# Altium PCB PCB design.PcbDoc
Units mm, origin at the board's own origin, x right, y up, seen from the top; angles counter-clockwise.
Board outline 52.96 x 52.45 mm, 2 copper layers (Top Layer, Bottom Layer); 17 components, 13 nets, 66 pads, 0 vias.
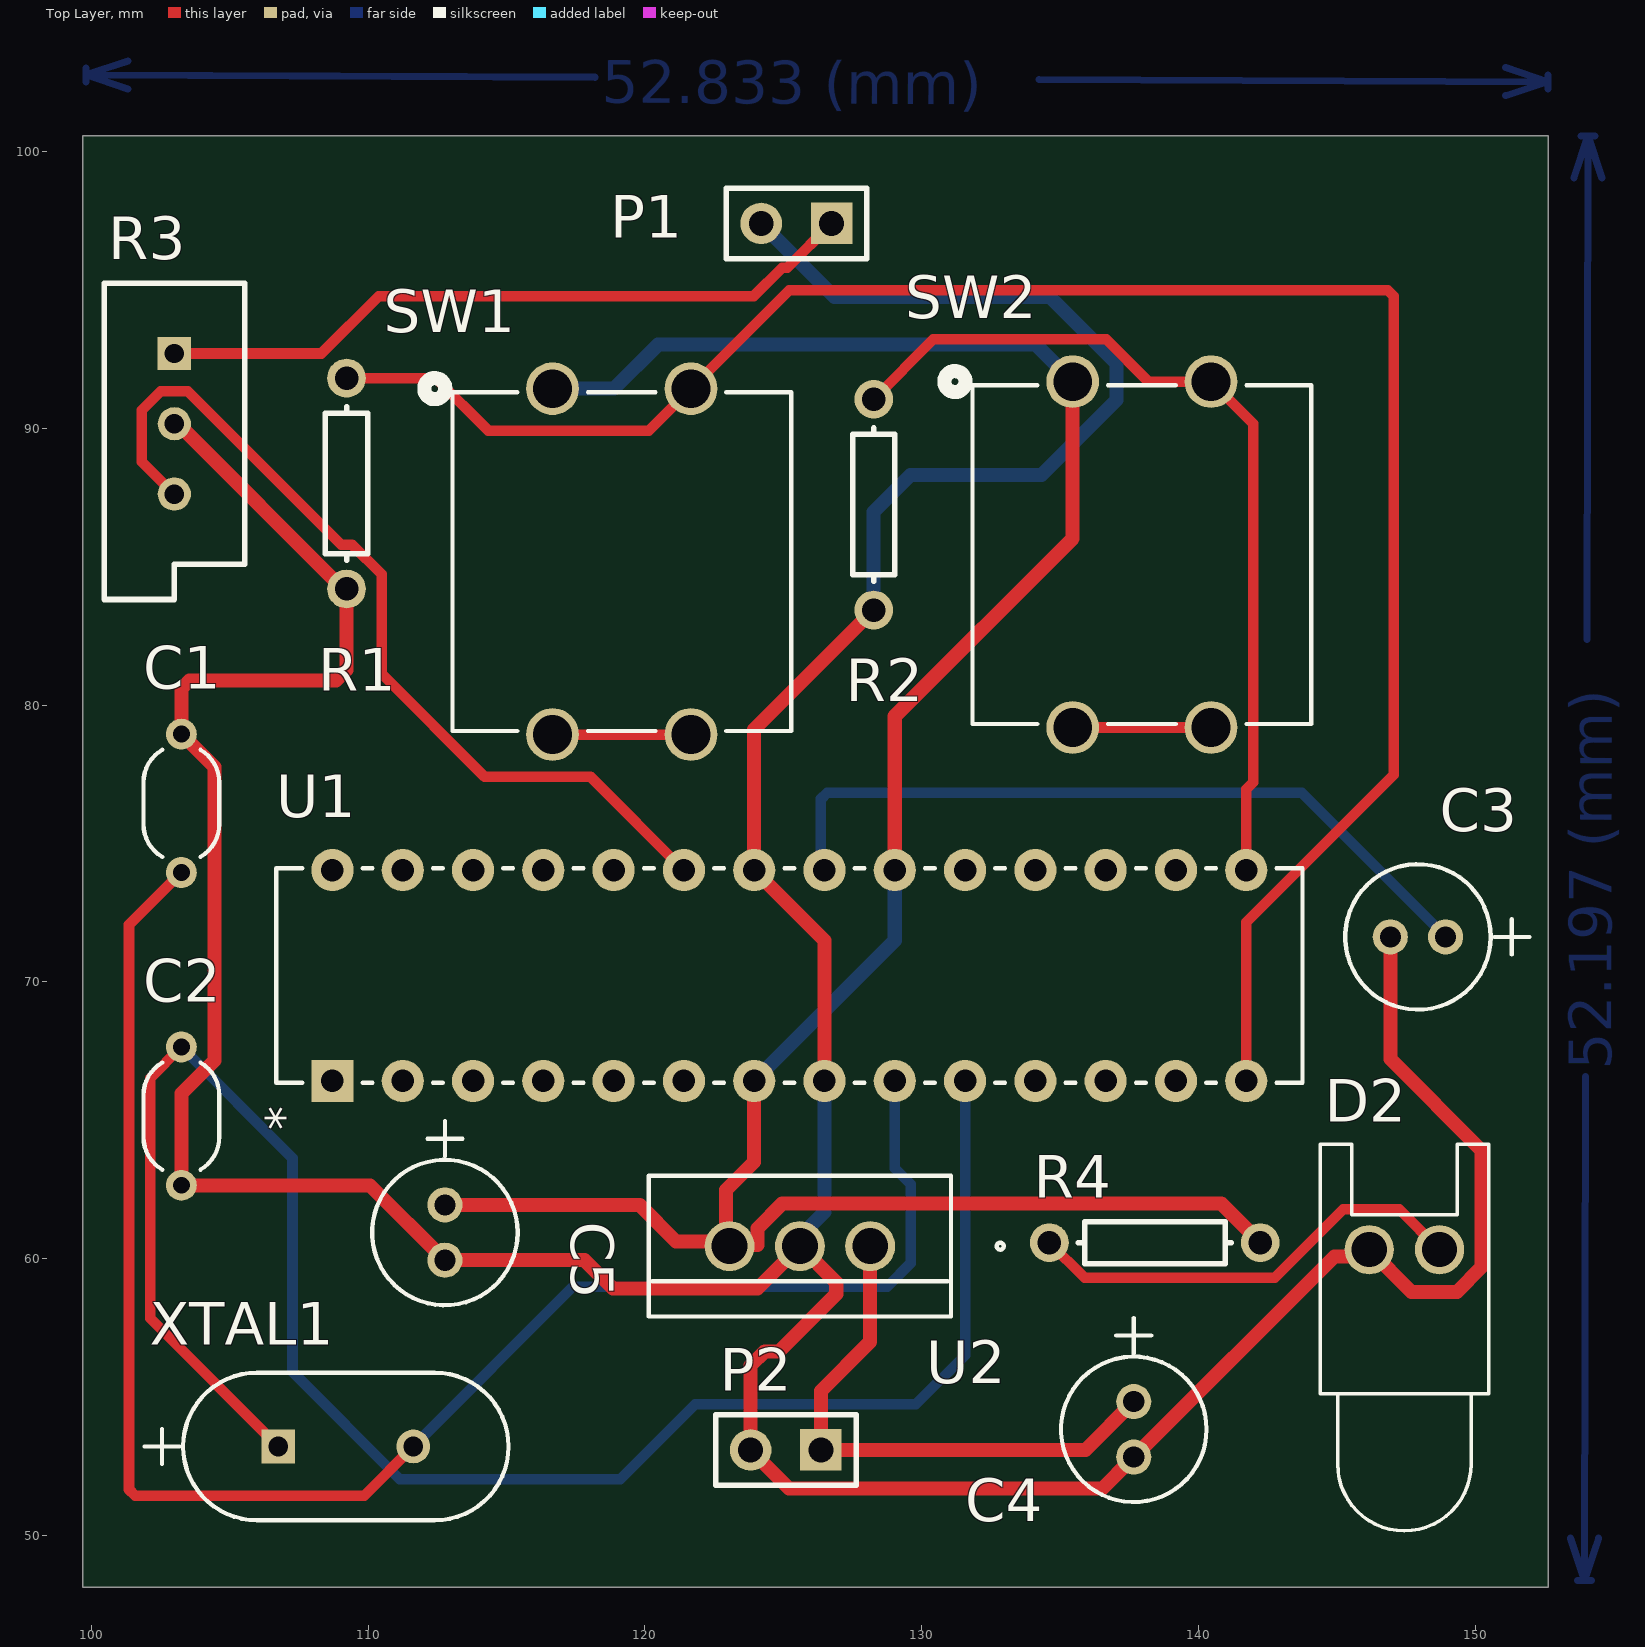
[diagram p0: Top Layer view]
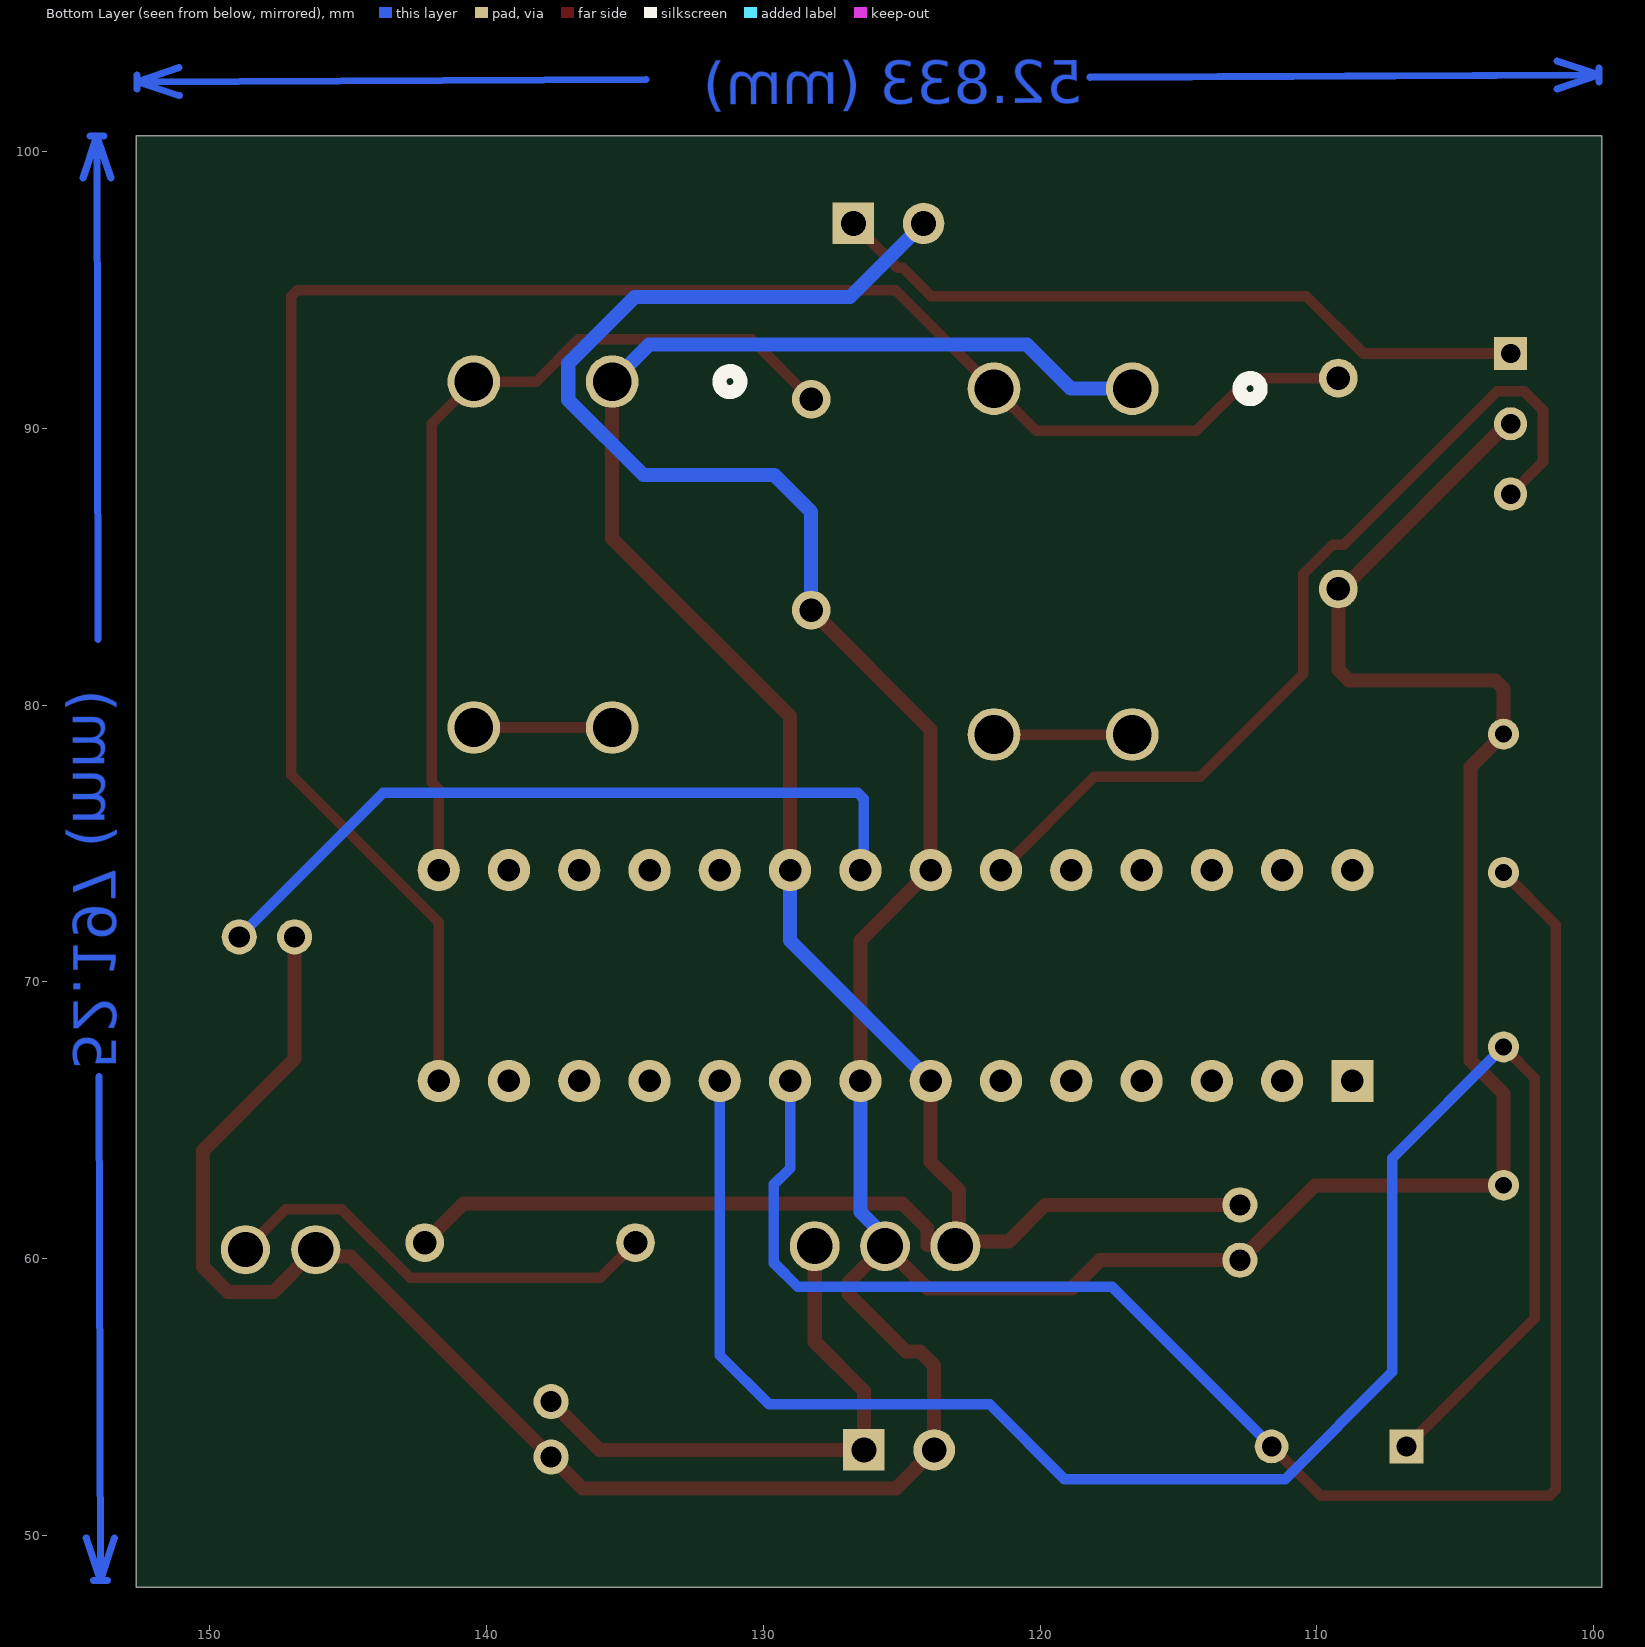
[diagram p1: Bottom Layer view, seen from below]

## Layer stack, top to bottom
Top Solder: solder mask 0.0102, Solder Resist, Dk 3.5
Top Layer: signal copper 0.0356
Dielectric 1: dielectric 0.32, FR-4, Dk 4.8
Bottom Layer: signal copper 0.0356
Bottom Solder: solder mask 0.0102, Solder Resist, Dk 3.5

## Board outline
99.695,48.133 152.654,48.133 152.654,100.584 99.695,100.584

## Design rules (kind name [scope] priority, off if disabled: settings)
Clearance [All] p1: gap=0.381 ignorepadtopadclearanceinfootprint=FALSE except(0.508: Arc-Hole Track-Hole SMDPad-Hole THPad-Hole Via-Hole Fill-Hole Poly-Hole Region-Hole Text-Hole)
ComponentClearance [All] p1: gap=0.508 collisioncheckmode=3 verticalgap=0.508 showdistances=FALSE
PolygonConnect [All] p1: connectstyle=Relief reliefconductorwidth=0.254 reliefentries=4 polygonreliefangle="90 Angle" airgapwidth=0.254
RoutingVias [All] p1: holewidth=0.711 width=1.27 viastyle="Through Hole" minholewidth=0.711 minwidth=1.27 maxholewidth=0.711 maxwidth=1.27
SilkToSolderMaskClearance [IsPad] p1: minsilkscreentomaskgap=0.229 clearancetoexposedcopper=TRUE
SolderMaskExpansion [All] p1: expansion=0.102 istentingtop=FALSE
Width Width_1 [InNet('+5') or InNet('GND') or InNet('VCC')] p1: maxlimit=0.635 minlimit=0.381 preferedwidth=0.508
Width [All] p2: maxlimit=0.508 minlimit=0.254 preferedwidth=0.381 minimp=50.000000 maximp=50.000000 favimp=50.000000
28 further rules are at their usual default settings.

## Components (designator, comment, footprint, x,y, rotation, side; value= is the part's Value field where it differs from the comment)
C1 "FA28C0G1H220JNU00" CAP_FA28_TDK 103.251,76.454 r270 top
C2 "FA28C0G1H220JNU00" CAP_FA28_TDK 103.251,65.151 r90 top
C3 "UFW2A0R1MDD1TD" CAP_UEP_5X11_NCH 148.939,71.628 r180 top
C4 "UFW2A0R1MDD1TD" CAP_UEP_5X11_NCH 137.668,54.832 r270 top
C5 "UFW2A0R1MDD1TD" CAP_UEP_5X11_NCH 112.776,61.944 r270 top
D2 "LED0" LED-0 147.447,60.325 r0 top
P1 "Header 2" HDR1X2 126.746,97.409 r180 top
P2 "Header 2" HDR1X2 126.365,53.086 r180 top
R1 "Res1" AXIAL-0.3 109.22,88.011 r90 top value=1K
R2 "Res1" AXIAL-0.3 128.27,87.249 r270 top value=1K
R3 "RPot" VR5 102.997,90.17 r270 top value=1K
R4 "Res1" AXIAL-0.3 138.43,60.579 r180 top value=1K
SW1 "TL1100FF160Q" TL1100F 116.666,91.44 r0 top
SW2 "TL1100FF160Q" TL1100F 135.462,91.694 r0 top
U1 "ATMEGA328P-PU" 28P3_ATM 108.712,66.421 r90 top
U2 "LM7805CT" TO-220_FAS 128.143,60.452 r180 top
XTAL1 "ABL-20.000MHZ-B2" XTAL_ABL_ABR 106.756,53.213 r0 top

## Footprints (in the part's own frame and the unit in brackets; to place one, negate y for a bottom-side part, rotate by r counter-clockwise, add the part's x,y. Pads: shape width x height; smd on the part's side, far side on the other; paste and mask are expansions set on the pad)
28P3_ATM [mil]
  rect 60x60 hole 32 mask+0: 1(0,0)
  round 60 hole 32 mask+0: 2(0,-100) 3(0,-200) 4(0,-300) 5(0,-400) 6(0,-500) 7(0,-600) 8(0,-700) 9(0,-800) 10(0,-900) 11(0,-1000) 12(0,-1100) 13(0,-1200) 14(0,-1300) 15(300,-1300) 16(300,-1200) 17(300,-1100) 18(300,-1000) 19(300,-900) 20(300,-800) 21(300,-700) 22(300,-600) 23(300,-500) 24(300,-400) 25(300,-300) 26(300,-200) 27(300,-100) 28(300,0)
  silkscreen extent -3,-1380 303,80, body extent -20,-1365 299,85, height 205
AXIAL-0.3 [mm] "Axial Device, Thru-Hole; 2 Leads; 0.3 in Pin Spacing"
  round 1.4 hole 0.85: 1(-3.81,0) 2(3.81,0)
  silkscreen extent -2.77,-0.76 2.77,0.76
CAP_FA28_TDK [mil]
  round 44 hole 24 mask+0: 1(-98.43,0) 2(98.43,0)
  silkscreen extent -76,-54 76,54, body extent 0,0 10,10, height 10
CAP_UEP_5X11_NCH [mil]
  round 50 hole 30 mask+0: 1(0,0) 2(78.74,0)
  silkscreen extent -119,-103 143,103, body extent -60,-98 138,98, height 493
HDR1X2 [mm] "Connector; Header; 2 Position"
  rect 1.5x1.5 hole 0.9: 1(0,0)
  round 1.5 hole 0.9: 2(2.54,0)
  silkscreen extent -1.27,-1.27 3.81,1.27
LED-0 [mil] "LED; 2 Leads"
  round 70 hole 50: 1(50,0) 2(-50,0)
  silkscreen extent -120,-400 120,150
TL1100F [mm]
  round 1.905 hole 1.397 mask+0: 1(0,0) 2(0,-12.5) 3(5,0) 4(5,-12.5)
  silkscreen extent -4.64,-12.37 8.62,0.38, body extent -3.71,-13.23 8.29,0.78, height 8.35
TO-220_FAS [mil]
  round 71 hole 51 mask+0: 1(0,0) 2(100,0) 3(200,0)
  silkscreen extent -190,-100 315,100, body extent -110,-95 310,95, height 650
VR5 [mm] "Thru-Hole; 3 Leads"
  rect 1.2x1.2 hole 0.7: 1(-2.54,0)
  round 1.2 hole 0.7: 2(0,0) 3(2.54,0)
  silkscreen extent -5.08,-2.54 6.35,2.54
XTAL_ABL_ABR [mil]
  rect 48x48 hole 28 mask+0: 1(0,0)
  round 48 hole 28 mask+0: 2(192,0)
  silkscreen extent -190,-105 328,105, body extent -141,-110 332,110, height 138

## Part data
C1 C2 C3 C4 C5 SW1 SW2 U1 U2 XTAL1: "No Description Available", Copyright="Copyright (C) 2018 Accelerated Designs. All rights reserved", RefDes=RefDes, Type=DEV
  C1 C2: Built_By=EMA_Matt, Manufacturer_Part_Number=FA28C0G1H220JNU00, SourceLibrary=TDK_2019-10-09, Vendor=TDK
  C3 C4 C5: Built_By=EMA_Cory, Manufacturer_Part_Number=UFW2A0R1MDD1TD, SourceLibrary=Nichicon_2019-09-13, Vendor=Nichicon
  SW1 SW2: Built_By=EMA_Cory, Datasheet=https://sten-eswitch-13110800-production.s3.amazonaws.com/system/asset/product_line/data_sheet/143/TL1100.pdf, Manufacturer_Part_Number=TL1100FF160Q, SourceLibrary=E-Switch_2020-03-31, Vendor=E-Switch
  U1: Built_By=EMA_UL_Team, Manufacturer_Part_Number=ATMEGA328P-PU, SourceLibrary=Atmel_2011-04-02, Vendor=Atmel
  U2: Built_By=EMA_UL_Team, Manufacturer_Part_Number=LM7805CT, SourceLibrary=Fairchild_2008-01-01_, Vendor="Fairchild Semiconductor"
  XTAL1: Built_By=EMA_Cory, Datasheet=https://abracon.com/Resonators/ABL.pdf, Manufacturer_Part_Number=ABL-20.000MHZ-B2, SourceLibrary=Add_to_database_2020-12-08, Vendor=Abracon
D2: "Typical INFRARED GaAs LED", LatestRevisionDate=08-Jul-2005, LatestRevisionNote="Mech Layer 1 removed.", PackageDescription="LED; 2 Leads", PackageReference=LED-0, Published=8-Jun-2000, Publisher="Altium Limited"
P1 P2: "Header, 2-Pin", LatestRevisionDate=17-Jul-2002, LatestRevisionNote="Re-released for DXP Platform.", Publisher="Altium Limited"
R1 R2 R4: "Resistor", LatestRevisionDate=17-Jul-2002, LatestRevisionNote="Re-released for DXP Platform.", PackageDescription="Axial Device, Thru-Hole; 2 Leads; 0.3 in Pin Spacing", PackageReference=AXIAL-0.3, Published=8-Jun-2000, Publisher="Altium Limited"
R3: "Potentiometer", LatestRevisionDate=17-Jul-2002, LatestRevisionNote="Re-released for DXP Platform.", PackageDescription="Variable Resistor, Thru-Hole; 3 Leads", PackageReference=VR5, Published=8-Jun-2000, Publisher="Altium Limited", Set Position=0.5, Sim Note="Enter the Resistance value and the set point into parameter fields."

## Nets (pads, with @x,y where several pads share a name; then routed paths per layer and width w, separated by ;. In a path a pad name is that pad's centre, name@x,y a point inside that pad or via, vN(x,y) a via of type N, cw(c..) or ccw(c..) an arc to the next point about the centre after c; other vN are vias at no path point)
+5: C5.1 R4.1 SW1.1 SW2.1 U1.7 U1.20 U2.3 | length 88.2
  Top Layer w0.508: C5.1 119.815,61.944 121.132,60.627 122.888,60.627 U2.3@122.936,60.579 ; U1.7 123.952,63.5 122.936,62.484 U2.3@122.936,60.579 ; U1.20 129.032,79.601 135.462,86.031 SW2.1 ; R4.1 140.83,61.989 124.966,61.989 124.066,61.089 124.066,60.496 123.107,60.496 U2.3 U2.3@122.936,60.579
  Bottom Layer w0.508: SW1.1@116.459,91.567 116.586,91.44 SW1.1 118.89,91.44 120.478,93.027 128.189,93.027 134.129,93.027 SW2.1 ; U1.7 129.032,71.501 U1.20
GND: C1.1 C2.1 C3.2 C4.2 C5.2 D2.2 P1.2 P2.2 R1.1 R2.2 R3.2 U1.8 U1.22 U2.2 | length 172.7
  Top Layer w0.508: R3.2 103.124,90.17 109.093,84.201 R1.1 109.22,81.28 108.839,80.899 103.549,80.899 103.251,80.601 C1.1 104.445,77.76 104.445,67.157 103.251,65.963 C2.1 110.069,62.651 C5.2 117.827,59.944 118.855,58.915 124.066,58.915 U2.2 ; U2.2@125.603,60.803 U2.2 ; U1.8 126.492,71.501 U1.22 123.952,79.121 R2.2 ; C3.2 146.939,67.209 150.241,63.907 150.241,59.694 149.348,58.801 147.701,58.801 D2.2 145.934,60.082 144.918,60.082 C4.2 137.795,52.705 137.541,52.705 136.537,51.701 125.21,51.701 P2.2 123.825,56.134 124.333,56.642 124.841,56.642 126.917,58.718 126.917,59.138 U2.2
  Bottom Layer w0.508: P1.2 126.861,94.754 134.647,94.754 137.05,92.352 137.05,91.036 134.327,88.314 129.605,88.314 128.27,86.979 R2.2 ; U2.2 125.603,60.803 126.492,61.692 U1.8
NetC1_2: C1.2 U1.9 XTAL1.2 | length 61.7
  Top Layer w0.381: C1.2 101.359,72.062 101.359,51.658 101.582,51.435 109.855,51.435 XTAL1.2
  Bottom Layer w0.381: XTAL1.2 117.399,58.979 128.753,58.979 129.616,59.842 129.616,62.685 129.032,63.269 U1.9
NetC2_2: C2.2 U1.10 XTAL1.1 | length 67.9
  Top Layer w0.381: C2.2 102.121,66.521 102.121,57.848 XTAL1.1
  Bottom Layer w0.381: C2.2 107.268,63.634 107.268,55.908 111.144,52.032 119.116,52.032 121.821,54.737 129.794,54.737 131.572,56.515 U1.10
NetC3_1: C3.1 U1.21 | length 27.4
  Bottom Layer w0.381: U1.21 126.365,74.168 126.365,76.612 126.588,76.835 143.732,76.835 C3.1
NetD2_1: D2.1 R4.2 | length 16.3
  Top Layer w0.381: R4.2 135.892,59.307 142.767,59.307 145.245,61.785 147.256,61.785 D2.1
NetP1_1: P1.1 R3.1 | length 25.7
  Top Layer w0.381: R3.1 108.311,92.71 110.381,94.78 123.928,94.78 124.963,95.815 125.152,95.815 P1.1
NetSW1_2: SW1.2 SW1.4 | length 5
  Top Layer w0.381: SW1.2 SW1.4
NetSW2_2: SW2.2 SW2.4 | length 5
  Top Layer w0.381: SW2.2 SW2.4
"Next BTN": R2.1 SW2.3 U1.15 | length 32.1
  Top Layer w0.381: R2.1 130.429,93.218 136.678,93.218 138.202,91.694 SW2.3 141.986,90.17 141.986,77.215 141.732,76.961 U1.15
"Play / Stop BTN": R1.2 SW1.3 U1.14 | length 71.4
  Top Layer w0.381: R1.2 112.444,91.821 114.349,89.916 120.142,89.916 SW1.3 125.222,94.996 146.843,94.996 147.066,94.773 147.066,77.489 141.732,72.155 U1.14
Speaker: R3.3 U1.23 | length 32.7
  Top Layer w0.381: R3.3 101.825,88.802 101.825,90.655 102.512,91.342 103.482,91.342 109.022,85.801 109.418,85.801 110.492,84.728 110.492,81.131 114.207,77.416 118.037,77.416 U1.23
VCC: C4.1 P2.1 U2.1 | length 20.1
  Top Layer w0.508: U2.1 128.143,56.998 126.365,55.22 P2.1 135.922,53.086 C4.1
pads on no net: U1.1 U1.2 U1.3 U1.4 U1.5 U1.6 U1.11 U1.12 U1.13 U1.16 U1.17 U1.18 U1.19 U1.24 U1.25 U1.26 U1.27 U1.28
copper on no net: | length 88.1
  Bottom Layer w0.254: 99.798,102.527 99.8,103.035 ; 101.321,102.266 99.799,102.781 ; 101.326,103.282 99.799,102.781 ; 118.191,102.693 99.799,102.781 ; 134.239,102.616 152.631,102.528 ; 151.105,102.027 152.631,102.528 ; 151.11,103.043 152.631,102.528 ; 152.63,102.274 152.632,102.782 ; 153.452,49.9 153.956,48.374 ; 153.571,99.049 154.083,100.571 ; 153.702,48.375 154.21,48.374 ; 153.829,100.572 154.337,100.571 ; 154,66.576 153.956,48.374 ; 154.039,82.37 154.083,100.571 ; 154.468,49.897 153.956,48.374 ; 154.587,99.046 154.083,100.571

## Other copper
Bottom Layer:
  text "52.833 (mm)" at 118.441,101.778 h1.52 r359.73
  text "52.197 (mm)" at 154.915,66.828 h1.52 r89.86

## Text inside footprints (layer, text, board x,y; h text height)
U1: Top Overlay "*" at 107.569,64.643 h1.27 r90; Mechanical 13 "*" at 109.347,66.421 h1.27 r90
U2: Mechanical 13 "TAB" at 126.079,58.989 h0.64 r180